# Altium PCB 飞控板.PcbDoc
Units mm, origin at the board's own origin, x right, y up, seen from the top; angles counter-clockwise.
Board outline 69.65 x 72.69 mm, 4 copper layers (Top Layer, VCC, GND, Bottom Layer); 96 components, 107 nets, 389 pads, 187 vias.
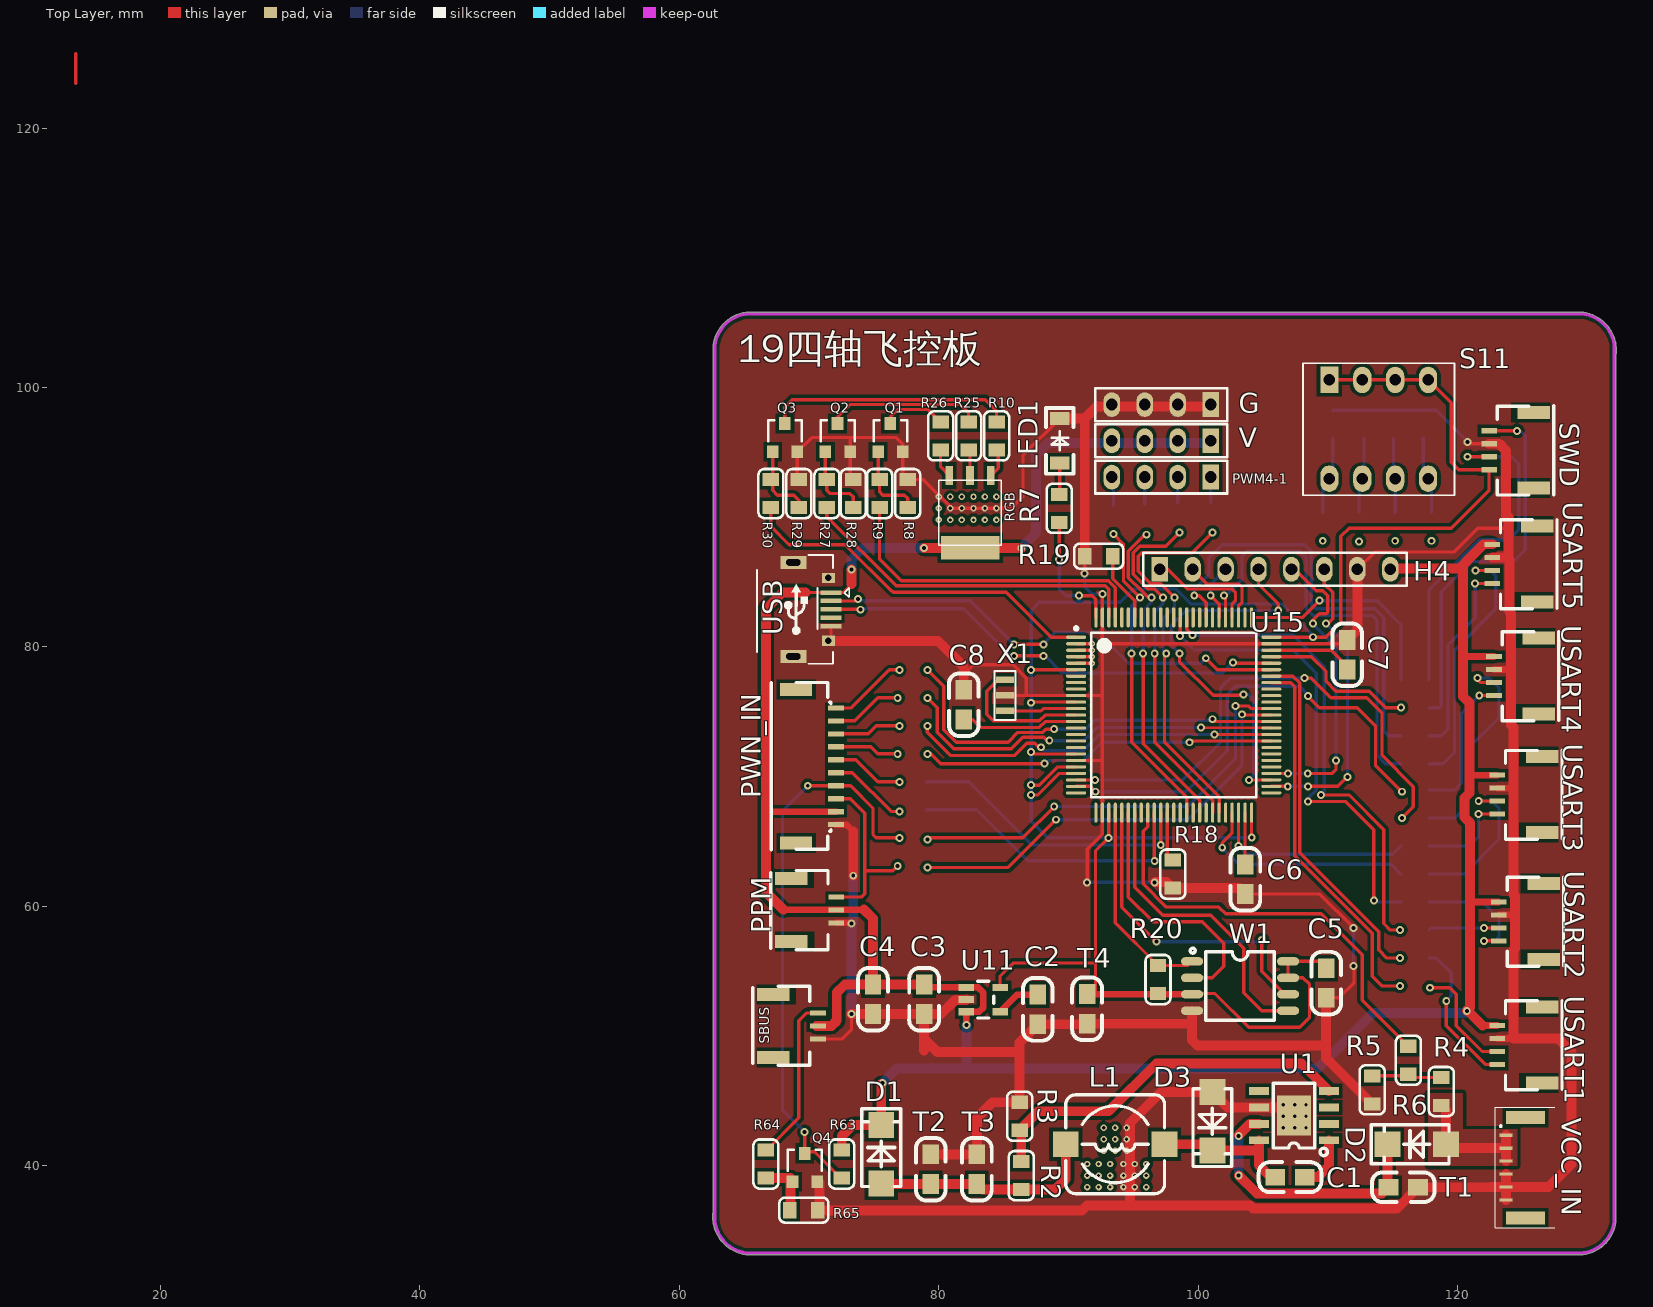
[diagram p0: Top Layer view]
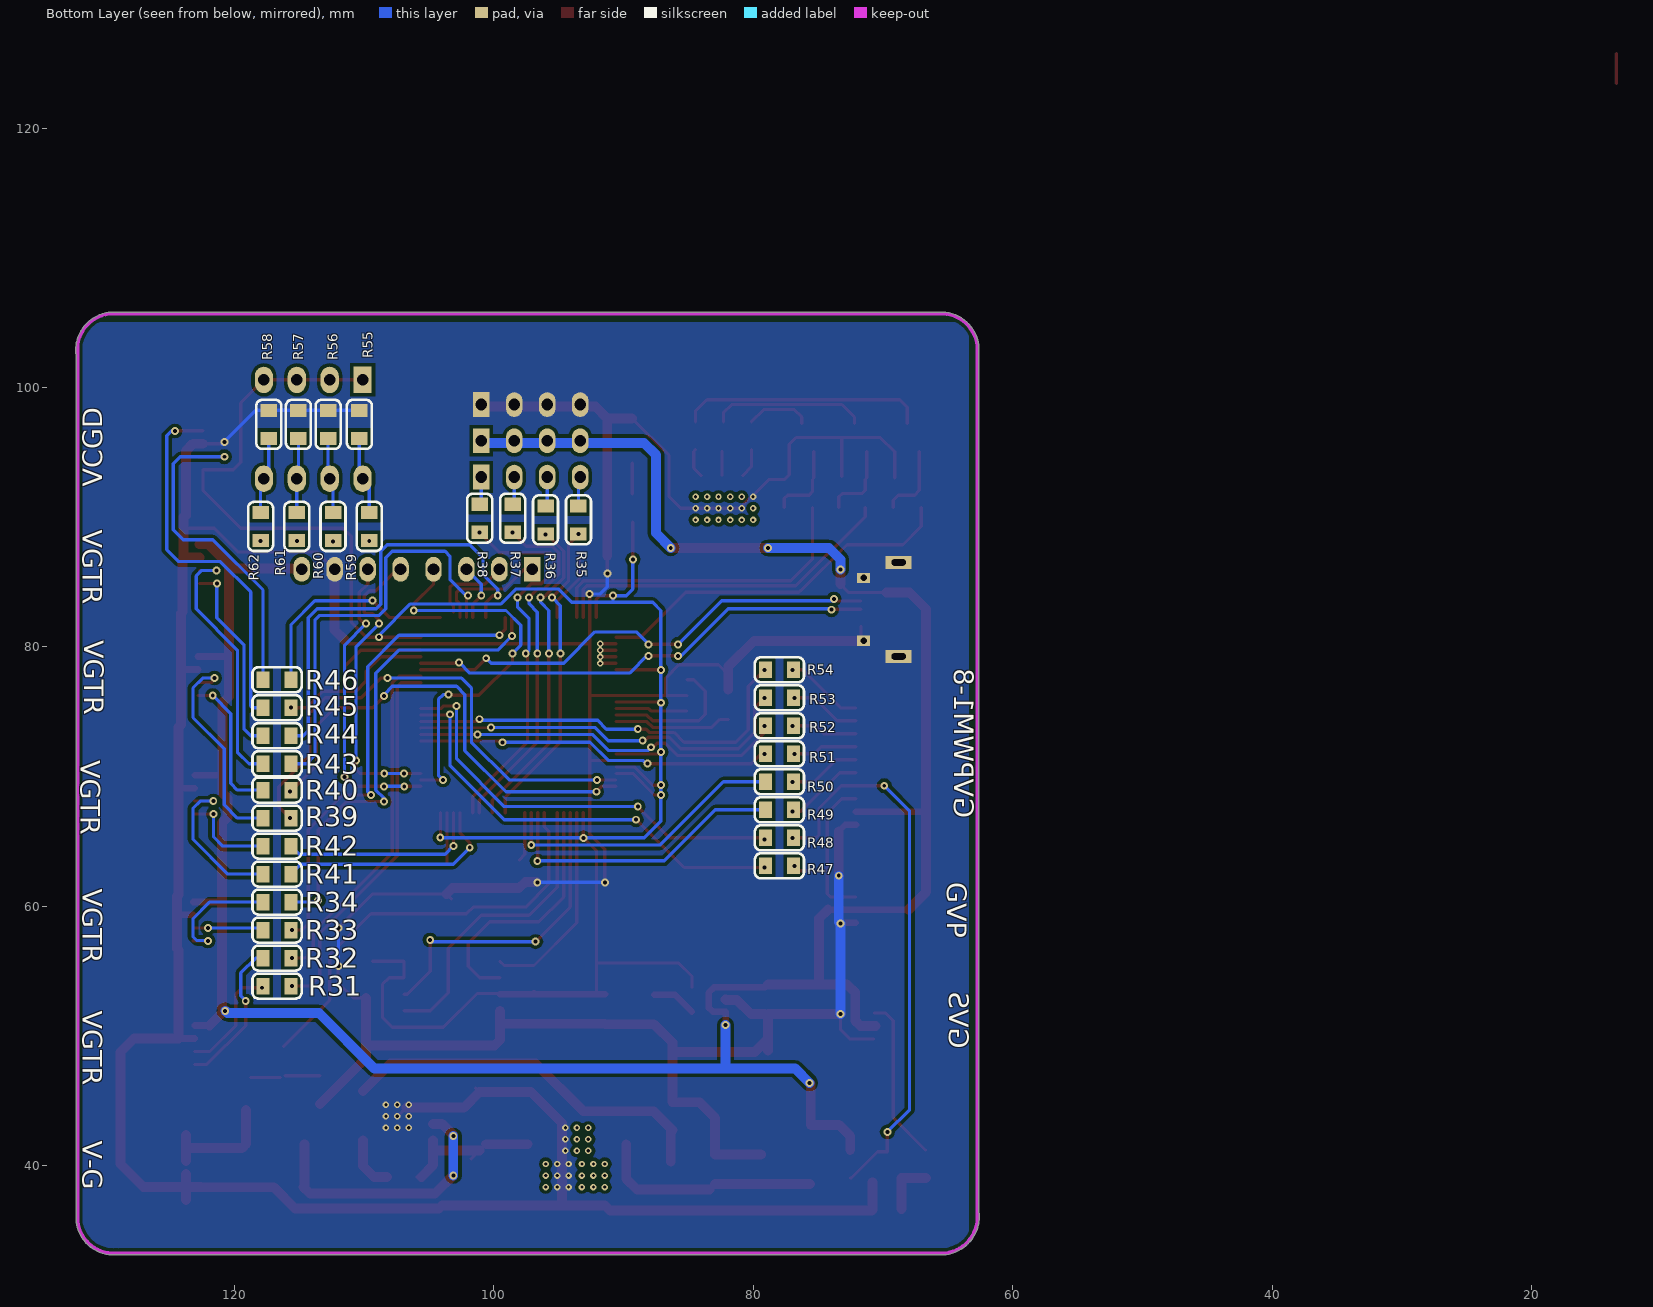
[diagram p1: Bottom Layer view, seen from below]
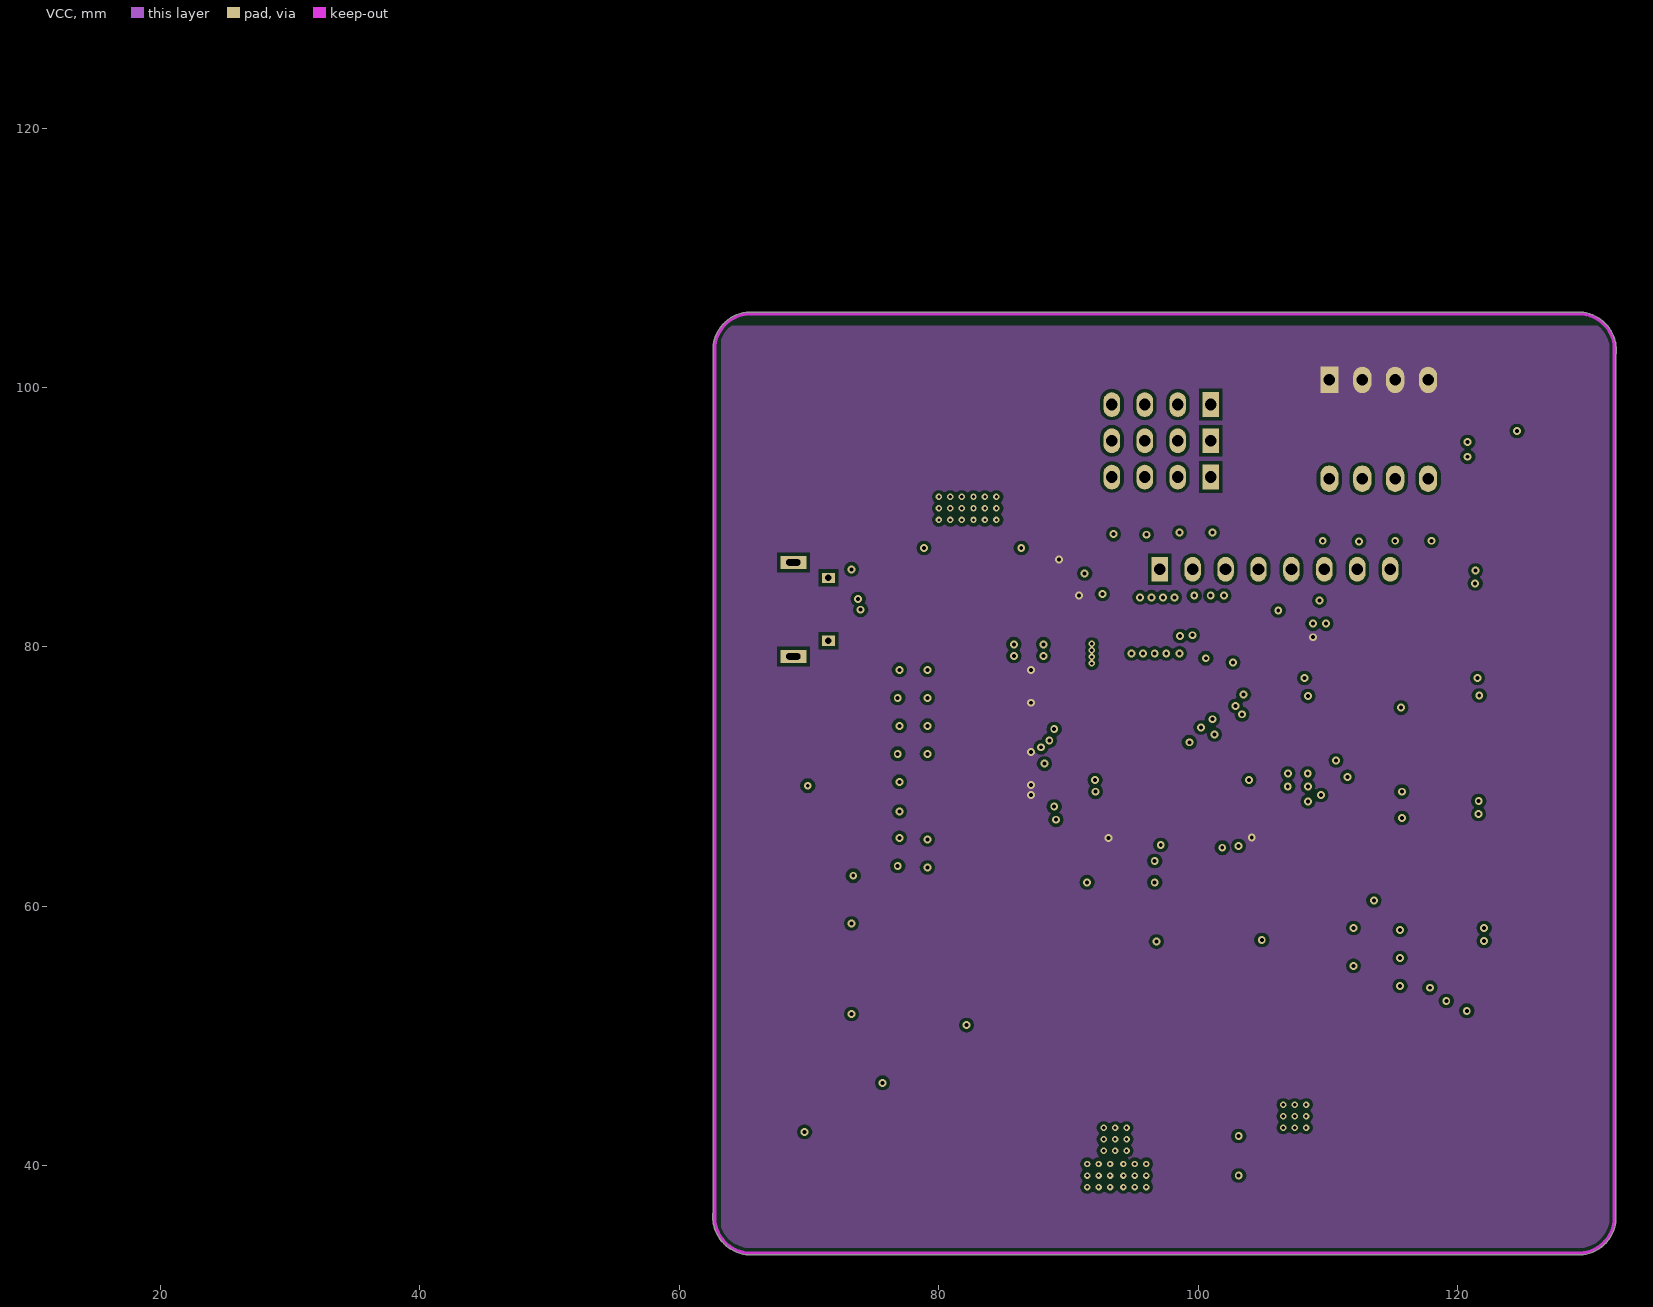
[diagram p2: VCC]
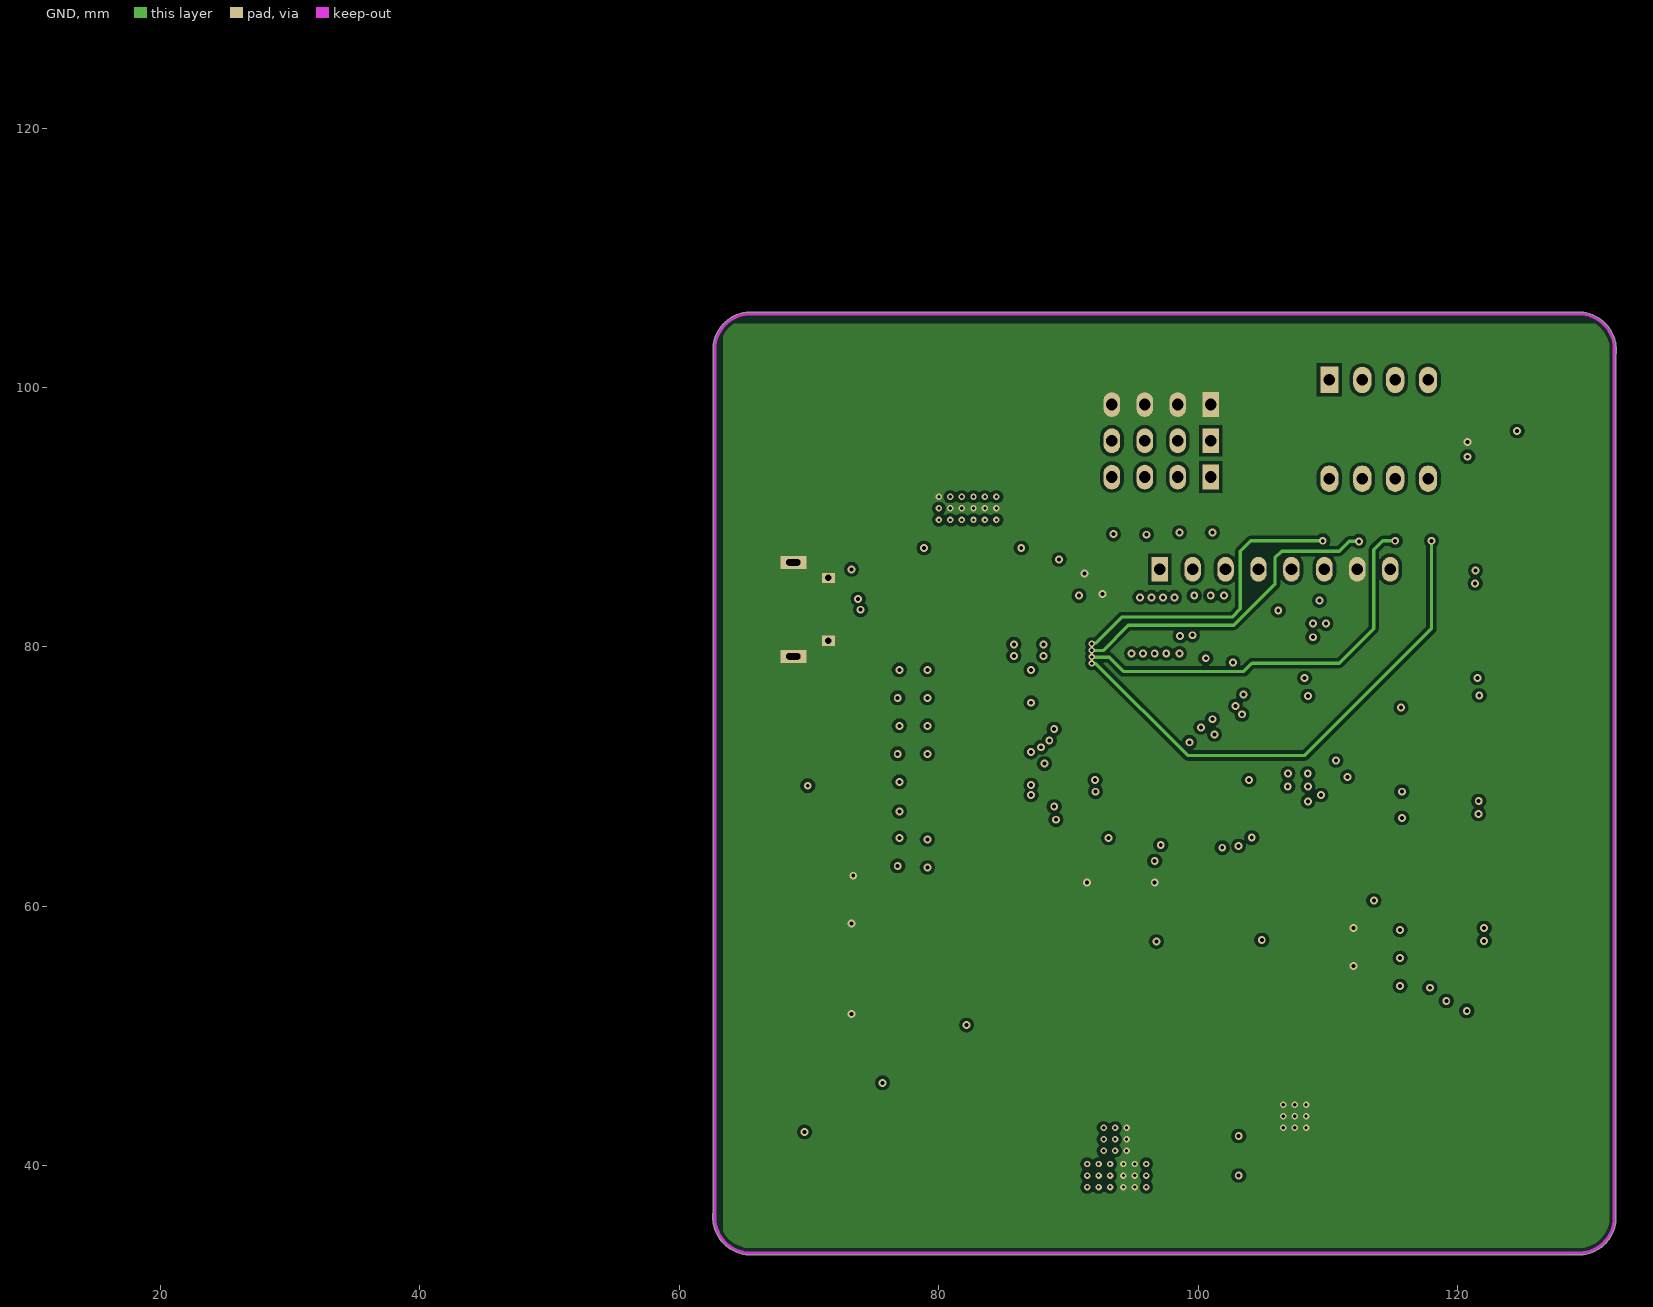
[diagram p3: GND]
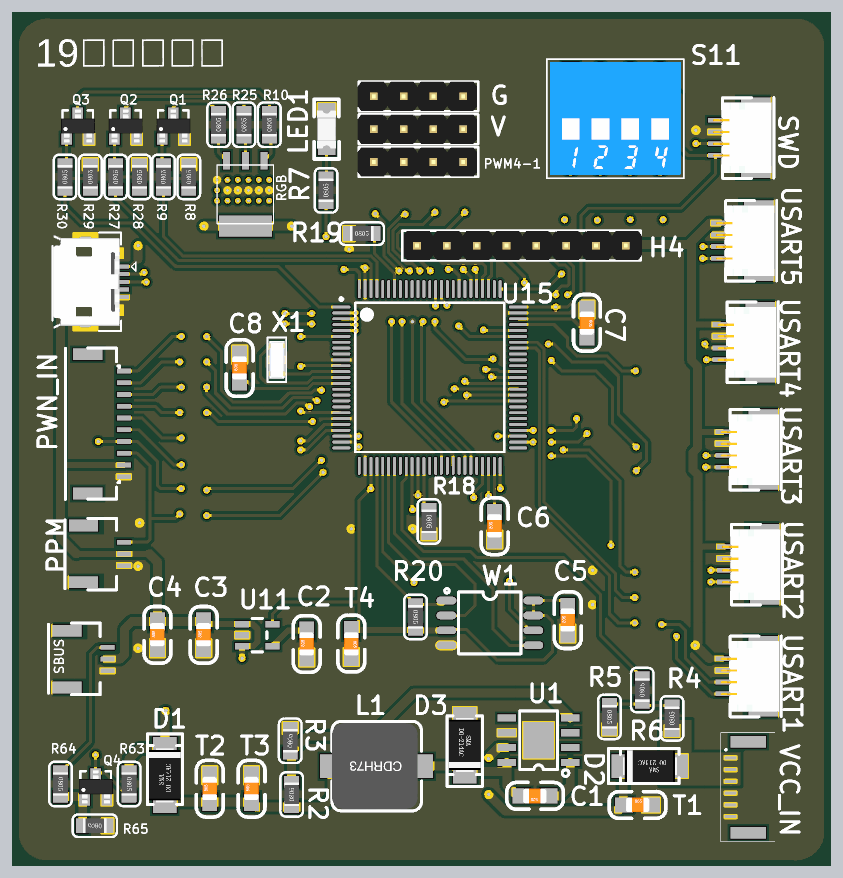
[diagram p4: 3D render of the assembled board from above, using the file's embedded part models]
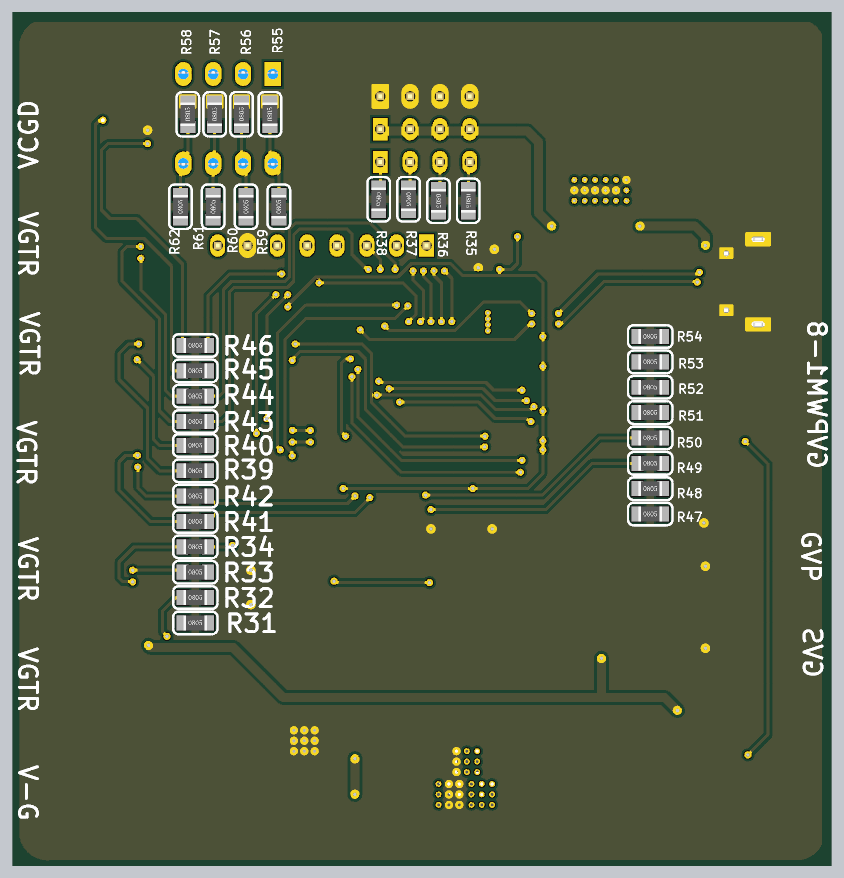
[diagram p5: 3D render of the assembled board from below, using the file's embedded part models]

## Layer stack, top to bottom
Top Layer: signal copper 0.0356
Dielectric: core 0.32, FR-4, Dk 4.8
VCC: signal copper 0.0356
Dielectric: prepreg 0.32, FR-4, Dk 4.8
GND: signal copper 0.0356
Dielectric: core 0.32, FR-4, Dk 4.8
Bottom Layer: signal copper 0.0356

## Board outline
62.646,35.472 ccw(c65.532,36.068) 65.134,33.148 ccw(c65.151,33.274) 65.151,33.147 128.896,33.147 ccw(c129.286,36.068) 132.206,35.67 ccw(c132.08,35.687) 132.207,35.687 132.207,102.48 ccw(c129.286,102.87) 132.233,102.87 ccw(c129.286,102.87) 132.207,103.26 132.207,103.378 ccw(c132.08,103.378) 132.172,103.466 ccw(c129.286,102.87) 129.684,105.79 ccw(c129.667,105.664) 129.667,105.791 65.922,105.791 ccw(c65.532,102.87) 62.612,103.268 ccw(c62.738,103.251) 62.611,103.251 62.611,36.458 ccw(c65.532,36.068) 62.611,35.678 62.611,35.56 ccw(c62.738,35.56)

## Design rules (kind name [scope] priority, off if disabled: settings)
Clearance Clearance_5 [All] p1: gap=0.254
Clearance Clearance_4 [All] p2: gap=0.254
Clearance Clearance_3 [All] p3: gap=0.025
Clearance Clearance_2 [All] p4: gap=0.025
Clearance Clearance_1 [All] p5: gap=0.025
Clearance [All] p6: gap=0.025
PlaneConnect [All] p1: planeconnectstyle=Relief reliefexpansion=0.508 reliefentries=4 reliefconductorwidth=0.508 reliefairgap=0.254
PolygonConnect [All] p1: connectstyle=Direct reliefconductorwidth=0.508 reliefentries=4 polygonreliefangle="90 Angle"
RoutingVias [All] p1: holewidth=0.711 width=1.27 viastyle="Through Hole" minholewidth=0.711 minwidth=1.27 maxholewidth=0.711 maxwidth=1.27
SilkscreenOverComponentPads [All] p1: minsilkscreentomaskgap=0.254
SolderMaskExpansion [All] p1: expansion=0.102
Width [All] p1: maxlimit=0.254 minlimit=0.254 preferedwidth=0.254
26 further rules are at their usual default settings.

## Components (designator, comment, footprint, x,y, rotation, side; value= is the part's Value field where it differs from the comment)
C1 "10nF50V" 0805C 108.204,39.116 r180 top
C2 "0.1uf50v" 0805C 87.63,50.927 r90 top
C3 "0.1uf50v" 0805C 78.857,51.707 r90 top
C4 "4.7uf16v" 0805C 74.92,51.707 r90 top
C5 "1uf10v" 0805C 109.855,52.959 r90 top
C6 "0.1uf50v" 0805C 103.632,60.96 r90 top
C7 "0.1uf50v" 0805C 111.506,80.518 r270 top
C8 "0.1uf50v" 0805C 81.915,74.422 r90 top
D1 "1N5819" DO214AC_SMA 75.565,40.894 r90 top
D2 "1N5819" DO214AC_SMA 116.84,41.656 r180 top
D3 "1N5819" DO214AC_SMA 101.092,43.434 r270 top
G "Header 4" HDR1X4 97.155,98.679 r180 top (schematic designator H3)
H4 "Header 8" HDR1X8 105.918,85.979 r0 top
L1 "CD54-22UH2A" CDRH73 93.599,41.656 r180 top
LED1 "" LED-1206 89.281,96.139 r180 top
PPM "PPM" SH1.0-3P#1 70.358,60.198 r90 bottom (schematic designator U9)
PWM4-1 "Header 4" HDR1X4 97.155,93.091 r180 top (schematic designator H1)
PWN_IN "SH1.0-10P" SH1.0-10P 69.977,70.231 r90 top (schematic designator P1)
Q1 "" SI2310 76.073,96.012 r180 top
Q2 "" SI2310 72.009,96.012 r180 top
Q3 "" SI2310 67.945,96.012 r180 top
Q4 "" SI2310 69.469,39.751 r180 top
R2 "50K" 0805R 86.36,39.243 r90 top
R3 "15K" 0805R 86.233,43.815 r90 top
R4 "10K" 0805R 118.745,45.72 r90 top
R5 "1K" 0805R 113.411,45.847 r270 top
R6 "1K" 0805R 116.205,48.133 r90 top
R7 "1K" 0805R 89.281,90.678 r90 top
R8 "10K" 0805R 77.597,91.821 r90 top
R9 "1K" 0805R 75.438,91.821 r90 top
R10 "50R" 0805R 84.455,96.266 r90 top
R18 "10K" 0805R 98.044,62.484 r270 top
R19 "10K" 0805R 92.329,86.995 r0 top
R20 "4.3K" 0805R 96.901,54.356 r270 top
R25 "50R" 0805R 82.296,96.266 r90 top
R26 "50R" 0805R 80.137,96.266 r90 top
R27 "1K" 0805R 71.374,91.821 r90 top
R28 "10K" 0805R 73.406,91.821 r90 top
R29 "10K" 0805R 69.215,91.821 r90 top
R30 "1K" 0805R 67.056,91.821 r90 top
R31 "1K" 0805R 116.713,53.848 r180 bottom
R32 "1K" 0805R 116.713,56.007 r180 bottom
R33 "1K" 0805R 116.713,58.166 r180 bottom
R34 "1K" 0805R 116.713,60.325 r180 bottom
R35 "1K" 0805R 93.472,89.789 r270 bottom
R36 "1K" 0805R 96.012,89.789 r270 bottom
R37 "1K" 0805R 98.552,89.916 r270 bottom
R38 "1K" 0805R 101.092,89.916 r270 bottom
R39 "1K" 0805R 116.713,66.802 r180 bottom
R40 "1K" 0805R 116.713,68.961 r180 bottom
R41 "1K" 0805R 116.713,62.484 r180 bottom
R42 "1K" 0805R 116.713,64.643 r180 bottom
R43 "1K" 0805R 116.713,70.993 r180 bottom
R44 "1K" 0805R 116.713,73.152 r180 bottom
R45 "1K" 0805R 116.713,75.311 r180 bottom
R46 "1K" 0805R 116.713,77.47 r180 bottom
R47 "1K" 0805R 77.978,63.119 r180 bottom
R48 "1K" 0805R 77.978,65.278 r180 bottom
R49 "1K" 0805R 77.978,67.437 r180 bottom
R50 "1K" 0805R 77.978,69.596 r180 bottom
R51 "1K" 0805R 77.978,71.755 r180 bottom
R52 "1K" 0805R 77.978,73.914 r180 bottom
R53 "1K" 0805R 77.978,76.073 r180 bottom
R54 "1K" 0805R 77.978,78.232 r180 bottom
R55 "10K" 0805R 110.363,97.155 r90 bottom
R56 "10K" 0805R 112.776,97.155 r90 bottom
R57 "10K" 0805R 115.062,97.155 r90 bottom
R58 "10K" 0805R 117.348,97.155 r90 bottom
R59 "10K" 0805R 109.602,89.281 r90 bottom
R60 "10K" 0805R 112.396,89.281 r90 bottom
R61 "10K" 0805R 115.189,89.281 r90 bottom
R62 "10K" 0805R 117.983,89.281 r90 bottom
R63 "10K" 0805R 72.517,40.132 r270 top
R64 "10K" 0805R 66.675,40.132 r270 top
R65 "10K" 0805R 69.596,36.576 r180 top
RGB "" RGB_LED 80.01,92.837 r270 top
S11 "SW-DIP4" 拨码开关4P 113.919,96.774 r0 top
SBUS "SBUS" SH1.0-3P#2 68.961,50.292 r270 bottom (schematic designator U8)
SWD "SWD" SH1.0-4P 125.222,95.25 r270 top (schematic designator U10)
T1 "100uf25V" 0805C 114.681,38.354 r0 top
T2 "47UF16V" 0805C 79.375,38.608 r90 top
T3 "47UF16V" 0805C 82.931,38.608 r90 top
T4 "10uf25V" 0805C 91.44,53.213 r270 top
U1 "TPS5430" TPS5430 107.569,44.704 r90 top
U11 "MIC5219" MIC5219 83.312,52.451 r270 top
U15 "" STM32F407VGT6= 97.917,74.295 r0 top
USART1 "USART1" SH1.0-4P 125.857,49.403 r270 top (schematic designator U3)
USART2 "USART2" SH1.0-4P 125.984,58.928 r270 top (schematic designator U4)
USART3 "USART3" SH1.0-4P 125.857,68.707 r270 top (schematic designator U5)
USART4 "USART4" SH1.0-4P 125.603,77.851 r270 top (schematic designator U6)
USART5 "USART5" SH1.0-4P 125.476,86.487 r270 top (schematic designator U7)
USB "ANO-USB" ANO-USB 69.088,82.804 r270 bottom (schematic designator U2)
V "Header 4" HDR1X4 97.155,95.885 r180 top (schematic designator H2)
VCC_IN "sh1.0-6p" sh1.0-6p 125.349,40.386 r90 top (schematic designator sh1.0-6p)
W1 "W25Q32" W25Q32 103.505,53.721 r270 top
X1 "陶瓷晶振" 陶瓷晶振 85.344,76.073 r270 top

## Footprints (in the part's own frame and the unit in brackets; to place one, negate y for a bottom-side part, rotate by r counter-clockwise, add the part's x,y. Pads: shape width x height; smd on the part's side, far side on the other; paste and mask are expansions set on the pad)
0805C [mil]
  rect 60x50 smd: 1(-0.71,-0.4) 2(89.29,-0.4)
  silkscreen extent -51,-45 139,45, body extent 6,-25 84,25, height 31
0805R [mil]
  rect 40x50 smd: 1(-42.5,0) 2(42.5,0)
  silkscreen extent -75,-38 75,38, body extent -39,-25 39,25, height 22
ANO-USB [mm]
  rect 0.35x1.6 smd far side: 1(-1.385,-2.599) 2(-0.735,-2.599) 3(-0.085,-2.599) 4(0.565,-2.599) 5(1.215,-2.599)
  rect 1x2 hole 0.5 slot 1.1 at 90 deg: 5(-3.71,0.301) 5(3.54,0.301)
  rect 0.8x1 hole 0.5: 5(-2.51,-2.409) 5(2.34,-2.409)
  body extent -4.09,-2.59 3.92,3.01, height 2.8
CDRH73 [mm]
  rect 2x2 smd: 1(-3.81,0) 2(3.81,0)
  silkscreen extent -3.81,-3.81 3.81,3.81, body extent -3.49,-3.65 3.81,3.65, height 3.65
DO214AC_SMA [mm]
  rect 2x2 smd: 1(-2.25,0) 2(2.25,0)
  silkscreen extent -2.5,-1.5 3.5,1.5, body extent -2.33,-1.35 2.27,1.35, height 2.4
HDR1X4 [mm] "C"
  rect 1.27x1.905 hole 0.9: 1(-3.81,0)
  oval 1.27x1.905 hole 0.9: 2(-1.27,0) 3(1.27,0) 4(3.81,0)
  silkscreen extent -5.08,-1.27 5.08,1.27, body extent -4.98,-1.25 5.18,1.25, height 8.2
HDR1X8 [mm]
  rect 1.27x1.905 hole 0.9: 1(-8.89,0)
  oval 1.27x1.905 hole 0.9: 2(-6.35,0) 3(-3.81,0) 4(-1.27,0) 5(1.27,0) 6(3.81,0) 7(6.35,0) 8(8.89,0)
  silkscreen extent -10.16,-1.27 10.16,1.27, body extent -10.06,-1.25 10.26,1.25, height 8.2
LED-1206 [mm]
  rect 1.5x1 smd: 1(-0.051,1.968) 2(-0.051,-1.46)
  silkscreen extent -1.12,-2.29 1.02,2.79, body extent -0.85,-1.32 0.75,1.88, height 1.1
MIC5219 [mil]
  rect 21.7x47.2 smd: 1(-51,-46.4) 2(-14,-46.4) 3(23,-46.4) 4(23,55.6) 5(-51,55.6)
  silkscreen extent -70,-12 42,37
RGB_LED [mm]
  rect 1.8x4.5 smd: 1(5.207,2.413)
  rect 1.5x0.6 smd: 2(-0.373,0.8) 4(-0.373,2.4) 6(-0.373,4)
  silkscreen extent 0,0 5,4.8, body extent 0,0 4.95,4.83, height 3
SH1.0-3P#1 [mm]
  rect 1x2.5 smd far side: 0(-2.897,-1.728) 0(1.945,-1.728)
  rect 0.4x1.2 smd far side: 1(0.525,1.729) 2(-0.475,1.729) 3(-1.475,1.729)
SH1.0-3P#2 [mm]
  rect 1x2.5 smd far side: 0(-2.897,1.728) 0(1.945,1.728)
  rect 0.4x1.2 smd far side: 1(0.525,-1.729) 2(-0.475,-1.729) 3(-1.475,-1.729)
SH1.0-4P [mm]
  rect 0.4x1.2 smd: 1(-1.406,-2.799) 2(-0.406,-2.799) 3(0.594,-2.799) 4(1.594,-2.799)
  rect 1x2.5 smd: 5(-2.827,0.658) 5(3.015,0.658)
  silkscreen extent -3.33,-2.16 3.55,2.18, body extent -2.89,-2.97 3.11,1.99, height 3.14
sh1.0-6p [mm]
  rect 0.25x1 smd: 1(1.968,1.621) 2(0.968,1.621) 3(-0.032,1.621) 4(-1.032,1.621) 5(-2.032,1.621) 6(-3.032,1.621)
  rect 1x3 smd: PAD(-4.407,0.121) PAD(3.343,0.121)
  silkscreen extent -5.18,-2.13 4.12,2.45
SH1.0-10P [mm]
  rect 1x2.5 smd: 0(-5.358,0.982) 0(6.484,0.982)
  rect 0.4x1.2 smd: 1(-3.937,-2.099) 2(-2.937,-2.099) 3(-1.937,-2.099) 4(-0.937,-2.099) 5(0.063,-2.099) 6(1.063,-2.099) 7(2.063,-2.099) 8(3.063,-2.099) 9(4.063,-2.099) 10(5.063,-2.099)
  silkscreen extent -5.87,-1.72 7.02,2.88
SI2310 [mm]
  rect 0.9x0.95 smd: 1(0.75,0.976) 2(-1.155,0.976)
  rect 0.9x1 smd: 3(-0.19,-1.208)
  silkscreen extent -1.5,-1.47 1.1,0.15, body extent -1.67,-1.54 1.23,1.26, height 1.3
STM32F407VGT6= [mm]
  oval 1.55x0.25 smd: 1(-7.33,6.449) 2(-7.33,5.949) 3(-7.33,5.449) 4(-7.33,4.949) 5(-7.33,4.449) 6(-7.33,3.949) 7(-7.33,3.449) 8(-7.33,2.949) 9(-7.33,2.449) 10(-7.33,1.949) 11(-7.33,1.449) 12(-7.33,0.949) 13(-7.33,0.449) 14(-7.33,-0.051) 15(-7.33,-0.551) 16(-7.33,-1.051) 17(-7.33,-1.551) 18(-7.33,-2.051) 19(-7.33,-2.551) 20(-7.33,-3.051) 21(-7.33,-3.551) 22(-7.33,-4.051) 23(-7.33,-4.551) 24(-7.33,-5.051) 25(-7.33,-5.551) 51(7.72,-5.551) 52(7.72,-5.051) 53(7.72,-4.551) 54(7.72,-4.051) 55(7.72,-3.551) 56(7.72,-3.051) 57(7.72,-2.551) 58(7.72,-2.051) 59(7.72,-1.551) 60(7.72,-1.051) 61(7.72,-0.551) 62(7.72,-0.051) 63(7.72,0.449) 64(7.72,0.949) 65(7.72,1.449) 66(7.72,1.949) 67(7.72,2.449) 68(7.72,2.949) 69(7.72,3.449) 70(7.72,3.949) 71(7.72,4.449) 72(7.72,4.949) 73(7.72,5.449) 74(7.72,5.949) 75(7.72,6.449)
  oval 0.25x1.55 smd: 26(-5.805,-7.076) 27(-5.305,-7.076) 28(-4.805,-7.076) 29(-4.305,-7.076) 30(-3.805,-7.076) 31(-3.305,-7.076) 32(-2.805,-7.076) 33(-2.305,-7.076) 34(-1.805,-7.076) 35(-1.305,-7.076) 36(-0.805,-7.076) 37(-0.305,-7.076) 38(0.195,-7.076) 39(0.695,-7.076) 40(1.195,-7.076) 41(1.695,-7.076) 42(2.195,-7.076) 43(2.695,-7.076) 44(3.195,-7.076) 45(3.695,-7.076) 46(4.195,-7.076) 47(4.695,-7.076) 48(5.195,-7.076) 49(5.695,-7.076) 50(6.195,-7.076) 76(6.195,7.974) 77(5.695,7.974) 78(5.195,7.974) 79(4.695,7.974) 80(4.195,7.974) 81(3.695,7.974) 82(3.195,7.974) 83(2.695,7.974) 84(2.195,7.974) 85(1.695,7.974) 86(1.195,7.974) 87(0.695,7.974) 88(0.195,7.974) 89(-0.305,7.974) 90(-0.805,7.974) 91(-1.305,7.974) 92(-1.805,7.974) 93(-2.305,7.974) 94(-2.805,7.974) 95(-3.305,7.974) 96(-3.805,7.974) 97(-4.305,7.974) 98(-4.805,7.974) 99(-5.305,7.974) 100(-5.805,7.974)
  silkscreen extent -7.45,-5.9 6.55,7.25
TPS5430 [mm]
  rect 0.6x1.55 smd: 1(-2.747,-2.508) 2(-1.477,-2.508) 3(-0.207,-2.508) 4(1.063,-2.508) 5(1.063,2.892) 6(-0.207,2.892) 7(-1.477,2.892) 8(-2.747,2.892)
  rect 3.1x2.6 smd: 9(-0.842,0.192)
  silkscreen extent -3.93,-2.39 1.66,1.79
W25Q32 [mm]
  oval 0.65x1.698 smd: 1(-2.032,-3.976) 2(-0.762,-3.976) 3(0.508,-3.976) 4(1.778,-3.976) 5(1.778,3.424) 6(0.508,3.424) 7(-0.762,3.424) 8(-2.032,3.424)
  silkscreen extent -3.05,-4.12 2.5,2.36
拨码开关4P [mil]
  rect 55x80 hole 35.43: 1(-150,150)
  oval 55x80 hole 35.43: 2(-50,150) 3(50,150) 4(150,150) 5(150,-150) 6(50,-150) 7(-50,-150) 8(-150,-150)
  silkscreen extent -230,-200 230,200, body extent -220,-188 220,190, height 248
陶瓷晶振 [mm]
  rect 0.5x1.4 smd: 1(-1.384,-0.24) 2(-0.184,-0.24) 3(1.016,-0.24)
  silkscreen extent -2.08,-1.04 1.72,0.56, body extent -1.78,-0.89 1.42,0.41, height 0.7

## Part data
C2 C3 C4 C5 C6 C7 C8: library part CAP
D1 D2 D3: library part 1N5817-5819SMD
G PWM4-1 V: "Header, 4-Pin"
L1: library part INDUCTOR
PPM SBUS SWD USART1 USART2 USART3 USART4 USART5: library part SH1.
PWN_IN: library part SH1.0
Q1 Q2 Q3 Q4: library part SI
U1: library part TPS
U11: library part MIC
U15: library part STM32F407V
USB: library part ANO
VCC_IN: library part sh1.
W1: library part W2

## Free pads (board coordinates)
  round 0.127 hole 0.127: 0(88.519,72.771) 0(92.054,69.744) 0(108.204,77.597)
  round 0.33 hole 0.203: 0(102.87,75.438) 0(103.378,74.803)

## Via types
v1: diameter 0.61, hole 0.305, Top Layer to Bottom Layer, 128 vias
v2: diameter 0.5, hole 0.25, Top Layer to Bottom Layer, 58 vias
v3: diameter 0.61, hole 0.305, Top Layer to Bottom Layer, tented top, 1 vias

## Nets (pads, with @x,y where several pads share a name; then routed paths per layer and width w, separated by ;. In a path a pad name is that pad's centre, name@x,y a point inside that pad or via, vN(x,y) a via of type N, cw(c..) or ccw(c..) an arc to the next point about the centre after c; other vN are vias at no path point)
BOOT1: R18.1 U15.37 | length 3.8
  Top Layer w0.254: U15.37 97.612,63.995 R18.1
GND: C2.1 C3.1 C4.1 C5.1 C6.1 C7.1 C8.2 D3.1 G.1 G.2 G.3 G.4 H4.7 LED1.2 PPM.3 PWN_IN.1 Q1.2 Q2.2 Q3.2 Q4.2 R3.2 R5.2 R8.2 R18.2 R19.1 R28.2 R29.2 R55.2 R56.2 R57.2 R58.2 R65.1 SBUS.1 SWD.2 T1.2 T2.2 T3.2 T4.2 U1.6 U1.9 U11.2 U15.10 U15.20 U15.27 U15.74 U15.99 USART1.2 USART2.2 USART3.2 USART4.2 USART5.2 USB.5 VCC_IN.4 VCC_IN.5 VCC_IN.6 W1.4 X1.2 | length 439
  Top Layer w0.254: R29.2@69.1,93.015 Q3.2 70.203,96.139 76.708,96.139 77.228,95.619 Q1.2 77.228,93.269 R8.2 78.803,92.901 81.026,90.678 85.598,90.678 86.487,91.567 86.487,94.755 LED1.2 ; SBUS.1 72.517,49.767 73.279,50.529 v1(73.279,51.689) ; USB.5@71.497,80.464 71.687,80.654 USB.5@71.687,81.589 ; PPM.3 PPM.3@72.136,58.674 ; R28.2@73.164,93.142 Q2.2 73.164,96.024 ; v1@73.23,58.723 v1(73.279,58.674) ; C3.1 C3.1@79.121,51.689 ; C8.2@81.816,76.581 C8.2 81.925,77.861 82.677,78.613 85.725,78.613 86.741,77.597 86.741,76.244 ; X1.2 85.117,76.244 X1.2@85.356,76.244 ; X1.2@85.33,76.27 X1.2@85.356,76.244 ; U15.20 92.609,71.244 ; v1(91.25,85.661) R19.1 ; v1(91.44,61.849) 91.44,64.389 92.612,65.561 U15.27 92.612,76.244 ; v1(92.612,84.074) U15.99 92.612,76.244 ; 92.632,80.244 U15.74 111.204,80.244 C7.1 ; D3.1 D3.1@101.382,45.974 ; C6.1@103.279,60.579 C6.1 109.365,60.942 v1(111.978,58.329) ; U1.9@106.742,44.497 U1.9 ; C5.1 110.853,52.941 112.014,54.102 v1@112.014,55.372 ; H4.7 113.602,87.312 119.697,87.312 121.539,89.154 123.912,89.154 ; T1.2 T1.2@117.016,38.411 ; v1@120.92,95.656 SWD.2 ; X1.2@85.356,76.244 86.741,76.244 ; 86.741,76.244 U15.10 92.612,76.244
  Top Layer w0.508: PWN_IN.1 72.898,66.294 73.406,65.786 ; PPM.3 v1@73.23,58.723 ; USART4.2 124.104,78.257 ; USART1.2 124.269,49.809 ; USART3.2 124.269,69.113 ; USART2.2 124.396,59.334
  Top Layer w0.762: Q4.2@70.802,38.724 70.802,36.576 70.835,36.543 91.034,36.543 91.428,36.937 94.742,36.937 ; USB.5@71.497,80.464 79.937,80.464 81.925,78.476 C8.2 ; v1(73.279,51.689) C4.1 C3.1 78.867,48.895 ; v1(73.406,62.357) 73.406,65.786 ; 78.867,49.784 79.883,48.768 86.106,48.768 ; C3.1@79.121,51.689 80.183,51.689 81.271,52.777 82.104,52.777 U11.2 ; T2.2 T3.2 82.941,43.698 84.138,44.895 R3.2 86.233,49.502 C2.1 T4.2@91.394,50.909 ; LED1.2 91.249,97.599 ; R19.1 91.25,97.6 ; T4.2 99.511,50.945 ; G.4@93.159,98.521 G.4@93.218,98.521 ; G.4@93.345,98.648 G.4@93.218,98.521 ; v1@96.678,61.88 97.569,61.88 R18.2 103.18,61.404 C6.1 ; W1.4 99.529,49.696 99.949,49.276 109.728,49.276 ; G.1@100.779,98.521 G.4@93.218,98.521 ; U1.9@106.742,44.497 U1.6 102.279,44.497 D3.1 97.119,45.684 94.742,43.307 94.742,36.937 ; C5.1 109.865,48.313 R5.2 ; C7.1 112.268,81.308 H4.7 ; T1.2@116.949,38.335 115.317,36.703 104.227,36.703 103.993,36.937 94.742,36.937 ; T1.2 122.555,38.344 ; SWD.2 123.209,95.656 123.741,95.123 123.741,90.142 ; 122.565,38.354 VCC_IN.5 ; USART5.2 123.912,86.893 123.912,89.154 123.912,90.027 ; VCC_IN.6 VCC_IN.5 ; VCC_IN.4 VCC_IN.5 ; 123.995,86.707 123.995,82.709 124.122,82.582 124.122,73.989 124.293,73.818 124.293,60.924 124.42,60.797 124.42,56.744 124.293,56.617 124.293,49.809 127.737,49.809 128.778,48.768 128.778,40.132 127,38.354 VCC_IN.5 ; 91.25,97.6 92.171,98.521 G.4@93.218,98.521
  Bottom Layer w0.254: v1(73.279,51.689) v1@73.439,51.849 ; v1@73.279,62.23 v1(73.406,62.357) ; v1(91.25,85.661) 91.25,84.645 91.821,84.074 v1(92.612,84.074) ; v1(91.44,61.849) v1(96.647,61.849) ; R55.2 R56.2 R57.2 R58.2 118.341,98.234 v1(120.777,95.799) v1@120.945,95.631 ; v1(111.978,55.408) v1(111.978,58.329)
  Bottom Layer w0.762: v1(73.279,51.689) v1(73.279,58.674) ; v1@73.406,58.801 v1(73.406,62.357)
  other v2: 94.234,38.354 95.116,38.354 94.234,39.243 95.116,39.243 94.234,40.132 95.116,40.132 94.475,41.148 94.475,42.037 94.475,42.926 106.553,42.926 107.435,42.926 108.318,42.926 106.553,43.815 107.435,43.815 108.318,43.815 106.553,44.704 107.435,44.704 108.318,44.704 80.892,90.678 81.775,90.678 82.677,90.678 83.559,90.678 84.442,90.678 80.01,91.567
GYR_INT: U15.88
LED_1: R9.1 U15.97 | length 25.4
  Top Layer w0.254: R9.1 75.438,86.741 77.089,85.09 93.091,85.09 93.129,85.052 93.129,85.038 93.612,84.555 U15.97
LED_2: R27.1 U15.98 | length 26.9
  Top Layer w0.254: R27.1 71.374,90.043 76.708,84.709 92.837,84.709 93.112,84.434 U15.98
LED_3: R30.1 U15.1 | length 28.5
  Top Layer w0.254: R30.1 67.056,89.281 68.453,87.884 72.771,87.884 76.341,84.314 76.385,84.314 76.498,84.201 85.217,84.201 88.674,80.744 U15.1
NetC1_1: C1.1 U1.1 | length 4.2
  Top Layer w0.762: C1.1 109.23,39.126 110.077,39.973 U1.1
NetC1_2: C1.2 D3.2 L1.1 U1.8 | length 12.1
  Top Layer w0.254: D3.2@100.62,41.656 D3.2 D3.2@101.763,40.513 ; C1.2@105.4,39.126 105.585,39.126 C1.2
  Top Layer w0.762: L1.1 D3.2@100.62,41.656 ; D3.2 104.641,41.184 ; U1.8 104.677,40.034 C1.2@105.585,39.126
NetC2_2: C2.2 U11.4 | length 3.5
  Top Layer w0.508: U11.4 86.053,53.195 C2.2
NetC6_2: C6.2 U15.49 | length 4
  Top Layer w0.254: C6.2@103.612,63.258 U15.49
NetC7_2: C7.2 U15.73 | length 6.6
  Top Layer w0.254: U15.73 110.248,79.744 111.496,78.496 C7.2
NetC8_1: C8.1 U15.14 | length 9.1
  Top Layer w0.254: C8.1 82.568,74.404 83.185,73.787 87.757,73.787 88.214,74.244 U15.14
NetD1_1: D1.1 L1.2 R2.1 T2.1 T3.1 | length 17.4
  Top Layer w0.254: T3.1 T3.1@83.368,38.164
  Top Layer w0.762: D1.1@75.619,38.59 T2.1 T3.1 ; T3.1@83.368,38.164 R2.1 88.964,38.164 89.789,38.989 L1.2
NetLED1_1: LED1.1 R7.2 | length 2.4
  Top Layer w0.254: R7.2@89.332,91.808 LED1.1
NetQ1_1: Q1.1 R8.1 R9.2 | length 6
  Top Layer w0.254: R9.2@75.323,93.015 Q1.1 ; R9.2 75.438,91.948 75.692,91.694 77.343,91.694 77.597,91.44 R8.1
NetQ1_3: Q1.3 R26.2 | length 5
  Top Layer w0.254: Q1.3 76.263,97.726 76.835,98.298 79.185,98.298 R26.2
NetQ2_1: Q2.1 R27.2 R28.1 | length 5.9
  Top Layer w0.254: R27.2@71.259,93.015 Q2.1 ; R27.2 71.374,92.075 71.628,91.821 73.152,91.821 73.406,91.567 R28.1
NetQ2_3: Q2.3 R25.2 | length 12
  Top Layer w0.254: Q2.3 72.199,97.726 73.152,98.679 81.661,98.679 82.296,98.044 R25.2
NetQ3_1: Q3.1 R29.1 R30.2 | length 5.9
  Top Layer w0.254: Q3.1 67.195,92.063 67.564,91.694 68.834,91.694 69.215,91.313 R29.1
NetQ3_3: Q3.3 R10.2 | length 19
  Top Layer w0.254: Q3.3 68.135,98.488 68.707,99.06 83.566,99.06 84.455,98.171 R10.2
NetQ4_1: Q4.1 R64.2 R65.2 | length 4.3
  Top Layer w0.762: R64.2 68.569,39.052 R65.2@68.569,36.651
NetR2_2: R2.2 R3.1 U1.4 | length 29.1
  Top Layer w0.762: R3.1 87.693,44.196 93.091,44.196 96.774,47.879 107.965,47.879 U1.4 ; R2.2 R3.1@86.36,42.609
NetR4_2: R4.2 R5.1 R6.1 | length 5
  Top Layer w0.254: R5.1 R6.1@116.078,46.926 ; R6.1@116.459,46.8 R4.2
NetR10_1: R10.1 RGB.6 | length 2.3
  Top Layer w0.254: RGB.6 84.582,93.782 84.582,95.06 R10.1
NetR19_2: R19.2 U15.94 | length 5.4
  Top Layer w0.254: R19.2 93.409,85.269 95.112,83.565 U15.94
NetR25_1: R25.1 RGB.4 | length 1.9
  Top Layer w0.254: RGB.4 R25.1@82.41,95.073
NetR26_1: R26.1 RGB.2 | length 2.3
  Top Layer w0.254: R26.1 80.137,93.883 RGB.2
NetR55_1: R55.1 R59.2 S11.8 | length 6
  Bottom Layer w0.254: R59.2 109.602,92.457 S11.8 110.363,93.218 R55.1
NetR56_1: R56.1 R60.2 S11.7 | length 5.7
  Bottom Layer w0.254: R60.2 112.396,92.711 S11.7 ; S11.7@112.776,93.091 R56.1
NetR57_1: R57.1 R61.2 S11.6 | length 5.6
  Bottom Layer w0.254: S11.6@115.062,93.091 R57.1 ; R61.2 S11.6
NetR58_1: R58.1 R62.2 S11.5 | length 5.4
  Bottom Layer w0.254: S11.5@117.348,93.345 R58.1 ; S11.5 117.983,92.71 R62.2
NetU15_12: U15.12 X1.3 | length 5.6
  Top Layer w0.254: X1.3 87.884,75.057 88.071,75.244 U15.12
NetU15_13: U15.13 X1.1 | length 10.8
  Top Layer w0.254: X1.1 84.569,77.457 83.693,76.581 83.693,74.803 84.201,74.295 87.757,74.295 88.206,74.744 U15.13
OTG_FS_DM: U15.70 USB.2 | length 37.1
  Top Layer w0.254: USB.2 73.633,83.539 v1(73.787,83.693) ; v1(85.785,80.197) v1(88.071,80.197) ; v1(100.584,79.121) 101.461,78.244 U15.70
  Bottom Layer w0.254: v1@73.914,83.566 82.416,83.566 v1(85.785,80.197) ; v1@88.138,80.264 89.027,81.153 92.202,81.153 94.615,78.74 100.203,78.74 v1(100.584,79.121)
OTG_FS_DP: U15.71 USB.3 | length 36.2
  Top Layer w0.254: USB.3 73.949,82.889 v1(73.974,82.864) ; v1(85.785,79.308) v1(88.071,79.308) ; v1@102.747,78.744 U15.71
  Bottom Layer w0.254: v1@74.041,82.931 81.915,82.931 85.538,79.308 v1(85.785,79.308) ; v1@88.138,79.375 89.535,77.978 101.854,77.978 v1(102.676,78.8)
POWER_INPUT: R6.2 U15.34 | length 33.3
  Top Layer w0.254: U15.34 96.112,66.14 95.758,65.786 95.758,61.722 97.536,59.944 101.6,59.944 102.108,59.436 109.474,59.436 112.649,56.261 112.649,52.769 R6.2
PPM_IN: PPM.1 PWN_IN.3 R47.2 | length 13.9
  Top Layer w0.254: PWN_IN.3 73.184,68.294 74.295,67.183 74.295,62.738 ; PPM.1 74.058,60.723 74.295,60.96 74.295,62.738 ; v1(76.835,63.119) 76.454,62.738 74.295,62.738
PWMIN_2: PWN_IN.4 Q4.3 R48.2 R63.2 | length 43.3
  Top Layer w0.254: v1(69.659,42.608) 69.659,41.086 70.42,41.086 72.454,39.052 R63.2 ; v1(69.898,69.294) PWN_IN.4 73.2,69.294 74.93,67.564 74.93,65.532 75.184,65.278 v1(76.962,65.278)
  Bottom Layer w0.254: v1(69.659,42.608) 67.945,44.322 67.945,67.341 v1(69.898,69.294)
PWMIN_3: PWN_IN.5 R49.2 | length 6.1
  Top Layer w0.254: PWN_IN.5 73.343,70.294 76.327,67.31 v1(76.962,67.31)
PWMIN_4: PWN_IN.6 R50.2 | length 5.6
  Top Layer w0.254: PWN_IN.6 73.613,71.294 75.311,69.596 v1(76.962,69.596)
PWMIN_5: PWN_IN.7 R51.2 | length 5
  Top Layer w0.254: PWN_IN.7 74.772,72.294 75.311,71.755 v1(76.835,71.755)
PWMIN_6: PWN_IN.8 R52.2 | length 5.1
  Top Layer w0.254: PWN_IN.8 74.564,73.294 75.184,73.914 v1(76.962,73.914)
PWMIN_7: PWN_IN.9 R53.2 | length 5.5
  Top Layer w0.254: PWN_IN.9@72.077,74.295 PWN_IN.9 73.532,74.294 75.311,76.073 v1(76.835,76.073)
PWMIN_8: PWN_IN.10 R54.2 | length 6.1
  Top Layer w0.254: PWN_IN.10 73.262,75.294 76.2,78.232 v1(76.962,78.232)
PWMOUT_1: PWM4-1.1 R38.1 | length 2
  Bottom Layer w0.254: R38.1@100.965,91.122 PWM4-1.1
PWMOUT_2: PWM4-1.2 R37.1 | length 2
  Bottom Layer w0.254: R37.1@98.425,91.122 PWM4-1.2
PWMOUT_3: PWM4-1.3 R36.1 | length 2.1
  Bottom Layer w0.254: R36.1@95.885,90.995 PWM4-1.3
PWMOUT_4: PWM4-1.4 R35.1 | length 2.1
  Bottom Layer w0.254: R35.1 PWM4-1.4@93.472,92.964
SPI1_CLK: U15.30 W1.6 | length 24.2
  Top Layer w0.254: U15.30 94.112,59.939 v1(96.774,57.277) ; v1(104.902,57.404) 104.902,54.988 106.677,53.213 W1.6
  Bottom Layer w0.254: v1(96.774,57.277) v1@104.775,57.277
SPI1_MISO: U15.31 W1.2 | length 20
  Top Layer w0.254: U15.31 94.612,60.709 96.52,58.801 100.33,58.801 101.981,57.15 101.981,55.372 101.092,54.483 W1.2
SPI1_MOSI: U15.32 W1.5 | length 23.5
  Top Layer w0.254: U15.32 95.112,61.479 97.282,59.309 100.965,59.309 103.505,56.769 103.505,53.34 104.902,51.943 W1.5
SPI1_NSS: R20.1 U15.29 W1.1 | length 15.9
  Top Layer w0.254: 93.612,58.725 U15.29 ; 93.637,58.699 R20.1 99.211,55.435 W1.1
SPI2_CLK: H4.6 U15.52 | length 23.3
  Top Layer w0.254: U15.52 v1(106.905,69.244) ; v1(108.458,69.244) 110.773,69.244 v1(111.506,69.977) ; H4.6 109.728,84.836 110.363,84.201 110.363,82.169 v1@109.982,81.788
  Bottom Layer w0.254: v1(106.905,69.244) v1(108.458,69.244) ; v1(109.855,81.788) 111.506,80.137 v1(111.506,69.977)
SPI2_CS1: H4.3 U15.81 | length 5
  Top Layer w0.254: v1(100.965,83.947) 101.612,83.3 U15.81
  Bottom Layer w0.254: v1(100.965,83.947) 100.965,84.836 H4.3 H4.3@102.108,85.471
SPI2_CS2: H4.2 U15.78 | length 6.4
  Top Layer w0.254: H4.2 100.711,84.836 103.137,84.836 103.378,84.595 103.378,83.439 103.112,83.173 U15.78@103.112,82.689
SPI2_CS3: H4.1 U15.79 | length 9.1
  Top Layer w0.254: H4.1@97.028,85.471 H4.1 97.663,85.979 99.187,84.455 102.616,84.455 102.87,84.201 102.87,83.566 102.612,83.308 U15.79
SPI2_MISO: H4.4 U15.53 | length 30.7
  Top Layer w0.254: v1(98.552,79.502) 98.552,78.867 101.155,76.263 103.441,76.263 v1(103.505,76.327) ; v1(103.907,69.744) U15.53 ; H4.4 104.648,84.836 106.172,83.312 v1(106.172,82.804)
  Bottom Layer w0.254: v1(98.552,79.502) 97.917,80.137 97.917,81.661 99.06,82.804 v1(106.172,82.804) ; v1(103.505,76.327) 103.886,76.327 104.267,75.946 104.267,70.104 v1(103.907,69.744)
SPI2_MOSI: H4.5 U15.54 | length 23.7
  Top Layer w0.254: U15.54 v1(106.921,70.244) ; H4.5 107.442,85.979 109.093,84.328 109.601,84.328 109.982,83.947 109.982,82.677 109.855,82.55 109.347,82.55 108.839,82.042 v1(108.839,81.788) ; v1(108.445,70.244) 110.35,70.244 110.617,70.511 v1(110.617,71.247)
  Bottom Layer w0.254: v1(106.921,70.244) v1(108.445,70.244) ; v1(108.839,81.788) 110.617,80.01 v1(110.617,71.247)
SPI2_NSS: U15.51
SUBS_IN: R64.1 SBUS.3 | length 12.8
  Top Layer w0.254: R64.1 66.738,41.211 69.215,43.688 69.215,51.181 69.801,51.767 SBUS.3
SW1: R59.1 U15.2 | length 24.9
  Top Layer w0.254: U15.2 v2(91.801,80.244)
  GND w0.254: v2@91.821,80.296 92.107,80.296 94.107,82.296 102.616,82.296 103.251,82.931 103.251,87.376 104.054,88.179 v1(109.601,88.179)
SW2: R60.1 U15.3 | length 26.5
  Top Layer w0.254: U15.3 v2@91.755,79.744
  GND w0.254: v2@91.784,79.715 92.669,79.715 94.615,81.661 102.743,81.661 105.918,84.836 105.918,86.868 106.426,87.376 110.871,87.376 111.633,88.138 v1(112.395,88.138)
  other v2: 91.801,79.736
SW3: R61.1 U15.4 | length 32.8
  Top Layer w0.254: U15.4 v2@91.747,79.244
  GND w0.254: v2@91.784,79.207 93.132,79.207 94.234,78.105 103.505,78.105 104.14,78.74 110.871,78.74 113.538,81.407 113.538,87.503 114.214,88.179 v1(115.189,88.179)
  other v2: 91.801,79.228
SW4: R62.1 U15.5 | length 41.1
  Top Layer w0.254: U15.5 v2@91.739,78.744
  GND w0.254: v2@91.784,78.699 92.116,78.699 99.187,71.628 108.204,71.628 117.983,81.407 v1(117.983,88.179)
  other v2: 91.801,78.72
SWCLK: R46.2 U15.76 | length 17.1
  Top Layer w0.254: U15.76 108.05,82.269 v1(109.347,83.566)
  Bottom Layer w0.254: v1(109.347,83.566) 113.792,83.566 115.633,81.725 R46.2
SWCLK_I: R46.1 SWD.3 | length 27
  Top Layer w0.254: v1(120.777,94.656) SWD.3 SWD.3@122.812,94.656
  Bottom Layer w0.254: R46.1 117.792,84.391 121.666,88.265 123.952,88.265 124.714,89.027 124.714,94.107 124.165,94.656 v1(120.777,94.656)
SWDIO: R45.2 U15.72 | length 12.1
  Top Layer w0.254: U15.72 108.712,79.244 109.855,78.101 109.855,77.343 110.617,76.581 113.19,76.581 114.46,75.311 v1(115.633,75.311)
SWDIO_I: R45.1 SWD.1 | length 29.1
  Top Layer w0.254: SWD.1 v1@124.578,96.656
  Bottom Layer w0.254: R45.1 118.618,75.311 118.745,75.438 118.745,84.236 121.087,86.579 124.298,86.579 125.222,87.503 125.222,96.266 v1@124.841,96.647
  other v1: 124.587,96.647
TIM1_CH1: R35.2 U15.40 | length 24.3
  Top Layer w0.254: v1(93.472,88.687) 94.234,87.925 94.234,85.09 v1(95.504,83.82) ; v1(94.869,79.502) 94.869,72.644 99.112,68.401 U15.40
  Bottom Layer w0.254: v1(94.869,79.502) 94.869,83.185 v1(95.504,83.82)
TIM1_CH2: R36.2 U15.42 | length 25
  Top Layer w0.254: v1(95.758,79.502) 95.758,72.517 100.112,68.163 U15.42 ; v1(96.012,88.646) 95.885,88.646 94.615,87.376 94.615,85.344 95.682,84.277 95.693,84.277 95.961,84.009 95.961,83.998 96.139,83.82 v1(96.393,83.82)
  Bottom Layer w0.254: v1(95.758,79.502) 95.758,82.804 96.393,83.439 v1(96.393,83.82)
TIM1_CH3: R37.2 U15.44 | length 27.6
  Top Layer w0.254: v3(96.647,79.502) 96.647,72.644 101.112,68.179 U15.44 ; v1(97.282,83.82) 96.647,84.455 96.139,84.455 94.996,85.598 94.996,87.263 95.49,87.757 97.495,87.757 v1(98.552,88.814)
  Bottom Layer w0.254: v3(96.647,79.502) 96.647,82.677 97.282,83.312 v1(97.282,83.82)
TIM1_CH4: R38.2 U15.45 | length 30.1
  Top Layer w0.254: v1(97.536,79.502) 97.409,79.375 97.409,72.644 101.612,68.441 U15.45 ; v1(98.171,83.82) 97.117,84.874 96.33,84.874 95.377,85.827 95.377,86.995 95.631,87.249 99.527,87.249 v1(101.092,88.814)
  Bottom Layer w0.254: v1(97.536,79.502) 97.282,79.756 97.282,82.169 98.171,83.058 v1(98.171,83.82)
TIM3_CH1: pad.0@103.378,74.803 R47.1 U15.63 | length 33.7
  Top Layer w0.254: v1(79.121,62.992) 85.344,62.992 v1(89.027,66.675) ; v1(103.378,74.803) 103.437,74.744 U15.63
  Bottom Layer w0.254: v1(89.027,66.675) 99.187,66.675 103.378,70.866 v1(103.378,74.803)
TIM3_CH2: pad.0@102.87,75.438 R48.1 U15.64 | length 33.1
  Top Layer w0.254: v1@79.248,65.278 86.487,65.278 v1(88.9,67.691) ; v1(102.87,75.438) 103.886,75.438 104.08,75.244 U15.64
  Bottom Layer w0.254: v1(88.9,67.691) 99.187,67.691 102.87,71.374 v1(102.87,75.438)
  other v1: 79.121,65.151
TIM3_CH3: R49.1 U15.35 | length 23
  Top Layer w0.254: U15.35 96.612,63.535 v1(96.647,63.5)
  Bottom Layer w0.254: R49.1 82.931,67.437 86.868,63.5 v1(96.647,63.5)
TIM3_CH4: R50.1 U15.36 | length 22.6
  Top Layer w0.254: v1(97.112,64.727) U15.36
  Bottom Layer w0.254: R50.1 82.296,69.596 87.165,64.727 v1(97.112,64.727)
TIM4_CH1: R51.1 U15.59 | length 27.6
  Top Layer w0.254: v1(79.121,71.755) 79.375,71.755 80.137,70.993 v1(88.138,70.993) ; v1(99.314,72.644) 99.414,72.744 U15.59
  Bottom Layer w0.254: v1(88.138,70.993) 88.265,70.993 88.519,71.247 91.186,71.247 92.583,72.644 v1(99.314,72.644)
TIM4_CH2: R52.1 U15.60 | length 29
  Top Layer w0.254: v1(79.121,73.914) 79.121,73.406 80.899,71.628 85.852,71.628 86.792,72.568 87.406,72.568 87.711,72.263 v1(87.884,72.263) v1@87.808,72.339 ; v1(101.254,73.244) U15.60
  Bottom Layer w0.254: v1(87.884,72.263) 88.138,72.009 91.142,72.009 92.374,73.241 101.251,73.241 v1(101.254,73.244)
TIM4_CH3: pad.0@88.519,72.771 R53.1 U15.61 | length 30.2
  Top Layer w0.254: v1(79.121,76.073) 79.883,75.311 79.883,73.406 81.153,72.136 85.598,72.136 86.487,73.025 88.092,73.025 88.346,72.771 v1(88.519,72.771) ; v1(100.203,73.787) U15.61
  Bottom Layer w0.254: v1(88.519,72.771) 91.186,72.771 92.202,73.787 v1(100.203,73.787)
TIM4_CH4: R54.1 U15.62 | length 31.8
  Top Layer w0.254: v1(79.121,78.232) 80.391,76.962 80.391,73.616 81.363,72.644 85.344,72.644 86.106,73.406 88.011,73.406 88.265,73.66 v1(88.9,73.66) ; v1(101.092,74.422) 101.27,74.244 U15.62
  Bottom Layer w0.254: v1(88.9,73.66) 91.313,73.66 91.986,74.333 101.206,74.333 101.117,74.422 v1(101.092,74.422)
TIM10_CH1: U15.95
USART1_RX: R32.2 U15.69 | length 27.4
  Top Layer w0.254: U15.69 107.295,77.744 107.823,77.216 107.823,64.135 113.919,58.039 113.919,56.642 114.554,56.007 v1(115.57,56.007)
USART1_RX_I: R32.1 USART1.4 | length 11.6
  Top Layer w0.254: v1(119.126,52.705) 119.126,50.8 122.117,47.809 USART1.4
  Bottom Layer w0.254: R32.1 118.364,56.007 119.507,54.864 119.507,53.086 v1(119.126,52.705)
USART1_TX: R31.2 U15.68 | length 29.2
  Top Layer w0.254: U15.68 107.134,77.244 107.442,76.937 107.442,63.881 113.411,57.912 113.411,54.61 114.173,53.848 v1(115.57,53.848)
USART1_TX_I: R31.1 USART1.3 | length 8.7
  Top Layer w0.254: v1(117.856,53.721) 119.38,53.721 119.888,53.213 119.888,50.8 121.879,48.809 USART1.3
USART2_RX: R34.2 U15.87 | length 36.7
  Top Layer w0.254: v1(98.612,80.839) U15.87 ; v1(108.458,68.072) 111.379,68.072 113.538,65.913 v1(113.538,60.452)
  Bottom Layer w0.254: v1(98.612,80.839) 99.695,79.756 107.315,79.756 109.093,77.978 109.093,68.961 108.458,68.326 v1(108.458,68.072) ; v1@113.665,60.325 R34.2
USART2_RX_I: R34.1 USART2.4 | length 9.7
  Top Layer w0.254: v1(122.047,57.334) USART2.4
  Bottom Layer w0.254: R34.1 121.92,60.325 123.19,59.055 123.19,57.658 122.896,57.364 v1@122.047,57.364
USART2_TX: R33.2 U15.86 | length 37.4
  Top Layer w0.254: U15.86 99.112,81.355 v1(99.568,80.899) ; v1(109.474,68.58) 111.633,68.58 114.3,65.913 114.3,58.674 114.808,58.166 v1(115.57,58.166)
  Bottom Layer w0.254: v1(99.568,80.899) 107.315,80.899 109.728,78.486 109.728,68.834 v1(109.474,68.58)
USART2_TX_I: R33.1 USART2.3 | length 5.5
  Top Layer w0.254: v1(122.047,58.334) USART2.3
  Bottom Layer w0.254: R33.1 117.96,58.334 v1(122.047,58.334)
USART3_RX: R42.2 U15.48 | length 15.6
  Top Layer w0.254: v1(103.112,64.655) U15.48
  Bottom Layer w0.254: v1(103.112,64.655) 103.759,64.008 114.998,64.008 R42.2
USART3_RX_I: R42.1 USART3.4 | length 7.3
  Top Layer w0.254: v1(121.609,67.113) USART3.4
  Bottom Layer w0.254: R42.1 120.904,64.643 121.609,65.348 v1(121.609,67.113)
USART3_TX: R41.2 U15.47 | length 17.6
  Top Layer w0.254: v1(101.854,64.516) 101.854,64.897 102.612,65.655 U15.47
  Bottom Layer w0.254: v1(101.854,64.516) 103.124,63.246 114.871,63.246 R41.2
USART3_TX_I: R41.1 USART3.3 | length 12.1
  Top Layer w0.254: v1(121.625,68.113) USART3.3
  Bottom Layer w0.254: R41.1 120.523,62.484 123.19,65.151 123.19,67.564 122.641,68.113 v1(121.625,68.113)
USART4_RX: R40.2 U15.24 | length 36.4
  Top Layer w0.254: U15.24 91.665,69.244 v1(92.075,68.834) ; v1(108.458,76.2) 109.347,75.311 112.268,75.311 113.665,73.914 113.665,70.866 v1(115.697,68.834)
  Bottom Layer w0.254: v1(92.075,68.834) 99.06,68.834 102.235,72.009 102.235,76.327 102.87,76.962 107.823,76.962 108.458,76.327 v1(108.458,76.2)
USART4_RX_I: R40.1 USART4.4 | length 11.2
  Top Layer w0.254: v1(121.666,76.257) USART4.4
  Bottom Layer w0.254: R40.1 119.761,68.961 120.269,69.469 120.269,74.86 v1(121.666,76.257)
USART4_TX: pad.0@92.054,69.744 pad.0@108.204,77.597 R39.2 U15.23 | length 39.9
  Top Layer w0.254: U15.23 v1(92.054,69.744) ; v1(108.204,77.597) 108.712,77.597 110.236,76.073 112.979,76.073 114.173,74.879 114.173,71.628 116.586,69.215 116.586,67.691 v1(115.697,66.802)
  Bottom Layer w0.254: v1(92.054,69.744) 98.827,69.744 101.727,72.644 101.727,76.835 102.489,77.597 v1(108.204,77.597)
USART4_TX_I: R39.1 USART4.3 | length 17
  Top Layer w0.254: v1(121.539,77.597) 121.412,77.597 121.752,77.257 USART4.3
  Bottom Layer w0.254: R39.1 119.761,66.802 120.777,67.818 120.777,72.136 123.19,74.549 123.19,76.835 122.428,77.597 v1(121.539,77.597)
USART5_RX: R44.2 U15.83 | length 34.5
  Top Layer w0.254: v1(99.695,83.947) 100.076,83.947 100.612,83.411 U15.83
  Bottom Layer w0.254: v1(99.695,83.947) 99.695,84.455 100.838,85.598 100.838,86.868 101.854,87.884 108.204,87.884 108.712,87.376 108.712,83.284 109.065,82.931 113.621,82.931 114.3,82.252 114.3,73.533 114.681,73.152 R44.2
USART5_RX_I: R44.1 USART5.4 | length 15.1
  Top Layer w0.254: v1(121.355,84.893) USART5.4
  Bottom Layer w0.254: R44.1 118.745,73.152 119.253,73.66 119.253,80.137 121.355,82.239 v1(121.355,84.893)
USART5_TX: R43.2 U15.80 | length 33
  Top Layer w0.254: v1(101.981,83.947) 102.112,83.816 U15.80
  Bottom Layer w0.254: v1(101.981,83.947) 102.108,83.947 103.378,85.217 103.378,86.995 103.759,87.376 107.823,87.376 108.331,86.868 108.331,82.931 108.839,82.423 113.411,82.423 113.792,82.042 113.792,71.628 114.427,70.993 R43.2
USART5_TX_I: R43.1 USART5.3 | length 20.3
  Top Layer w0.254: v1(121.371,85.893) USART5.3
  Bottom Layer w0.254: R43.1 118.872,70.993 119.761,71.882 119.761,79.756 122.936,82.931 122.936,85.471 122.514,85.893 v1(121.371,85.893)
USART_IMU_RX: 
USART_IMU_TX: 
VCC_2S~6S: D2.1 R4.1 VCC_IN.1 VCC_IN.2 VCC_IN.3 | length 9.4
  Top Layer w0.508: D2.1 D2.1@119.335,41.411
  Top Layer w0.762: D2.1 R4.1@119.09,44.296 ; D2.1@119.335,41.411 119.392,41.354 VCC_IN.2 ; VCC_IN.3 VCC_IN.2 ; VCC_IN.1 VCC_IN.2
VCC_3.3V: C5.2 R7.1 R20.2 S11.1 S11.2 S11.3 S11.4 SWD.4 T4.1 U11.5 U15.6 U15.11 U15.19 U15.21 U15.22 U15.28 U15.50 U15.75 U15.100 W1.3 W1.7 W1.8 | length 186.1
  Top Layer w0.254: U11.5 84.724,54.625 85.725,55.626 92.075,55.626 ; v1(87.122,68.58) 87.63,68.58 89.294,70.244 U15.22 ; v1(87.122,69.342) 87.757,69.342 89.159,70.744 U15.21 ; v1@87.133,71.744 U15.19 ; v1@87.134,78.244 U15.6 ; v1@87.174,75.744 U15.11 ; v1(89.281,86.741) R7.1 ; v1(90.805,83.947) 91.821,83.947 92.112,83.656 U15.100 ; T4.1@91.475,53.276 92.075,53.276 92.075,55.626 ; v1(93.091,65.278) 92.075,64.262 92.075,55.626 ; v1@93.112,65.299 U15.28 ; R20.2 101.283,53.276 103.886,50.673 107.823,50.673 108.585,51.435 108.585,53.975 108.077,54.483 W1.7 W1.8 C5.2@109.339,55.753 ; v1@104.112,65.306 U15.50 ; U15.75 v1(108.839,80.744) 109.827,80.744 110.998,81.915 110.998,88.519 111.633,89.154 119.507,89.154 122.423,92.07 SWD.4 120.085,93.656 119.507,94.234 119.507,98.806 S11.4 S11.3 S11.2 S11.1
  Top Layer w0.508: T4.1 R20.2@96.855,53.231 ; R20.2 R20.2@96.855,53.231 ; W1.3 96.873,53.213 R20.2@96.855,53.231
  Bottom Layer w0.254: v1(89.281,86.741) 89.281,84.455 89.789,83.947 v1(90.805,83.947) 90.805,83.502 ; v1@104.116,65.278 v1(93.091,65.278) 88.392,65.278 87.122,66.548 v1(87.122,68.58) v1(87.122,69.342) v1(87.122,71.882) v1(87.122,75.692) v1(87.122,78.232) 87.122,82.804 87.757,83.439 93.98,83.439 94.996,84.455 98.298,84.455 99.441,83.312 106.426,83.312 108.839,80.899 v1(108.839,80.744)
  other v1: 104.128,65.29
VCC_5.0V: C3.2 C4.2 D1.2 H4.8 PPM.2 PWN_IN.2 R63.1 RGB.1 SBUS.2 U11.1 U11.3 USART1.1 USART2.1 USART3.1 USART4.1 USART5.1 USB.1 V.1 V.2 V.3 V.4 | length 216.1
  Top Layer w0.254: 69.723,84.201 69.735,84.189 USB.1 72.632,84.189 73.279,84.836 ; 120.786,60.334 120.955,60.334
  Top Layer w0.508: 66.675,67.294 PWN_IN.2 ; 68.039,59.723 PPM.2 74.23,59.723 ; C3.2@79.096,53.746 U11.1 83.033,53.746 83.439,53.34 83.439,52.197 83.109,51.867 U11.3 v1(82.133,50.836) ; 120.534,79.257 USART4.1 ; 120.913,70.113 USART3.1 ; 120.955,60.334 USART2.1 ; 121.92,50.809 USART1.1
  Top Layer w0.762: 68.023,59.739 66.675,61.087 66.675,67.294 66.675,82.931 67.945,84.201 69.723,84.201 ; SBUS.2@70.563,50.767 71.722,50.767 72.136,51.181 72.136,53.34 72.771,53.975 C4.2 ; R63.1 72.517,42.291 73.37,43.144 D1.2 v1@75.565,46.299 ; 73.279,84.836 v1(73.279,85.979) ; 74.246,59.739 74.93,59.055 C4.2 ; C3.2 C4.2 ; v1(78.867,87.63) RGB.1 v1(86.36,87.63) ; H4.8@114.884,86.055 120.15,86.055 120.415,86.32 ; 121.92,50.809 120.904,51.825 v1(120.706,51.943) 120.955,52.192 120.955,60.334 120.955,66.438 120.523,66.87 120.523,68.36 120.904,68.741 120.904,75.69 120.415,76.178 120.415,86.32 ; USART5.1@122.677,87.909 121.995,87.909 120.701,86.614 120.701,86.606 120.415,86.32
  Bottom Layer w0.254: v1(120.706,51.943) v1@120.741,51.979
  Bottom Layer w0.762: v1(73.279,85.979) 73.279,86.741 74.168,87.63 v1(78.867,87.63) ; v1(75.656,46.391) 76.764,47.498 82.296,47.498 ; v1(82.133,50.836) 82.133,47.661 82.296,47.498 ; v1(86.36,87.63) 87.503,88.773 87.503,94.807 88.423,95.727 V.1@100.779,95.727 ; v1(120.706,51.943) 120.528,51.765 113.487,51.765 109.22,47.498 82.296,47.498
VCC_IN: D2.2 T1.1 U1.7 | length 20.5
  Top Layer w0.762: v1(103.124,39.243) 104.521,37.846 114.165,37.846 T1.1 ; v1@103.124,42.377 103.974,43.227 U1.7 ; T1.1@114.59,38.417 D2.2
  Bottom Layer w0.762: v1(103.124,39.243) v1(103.124,42.291)
pads on no net: PPM.0 PWN_IN.0 SBUS.0 SWD.5 U1.2 U1.3 U1.5 U15.7 U15.8 U15.9 U15.15 U15.16 U15.17 U15.18 U15.25 U15.26 U15.33 U15.38 U15.39 U15.41 U15.43 U15.46 U15.55 U15.56 U15.57 U15.58 U15.65 U15.66 U15.67 U15.77 U15.82 U15.84 U15.85 U15.89 U15.90 U15.91 U15.92 U15.93 U15.96 USART1.5 USART2.5 USART3.5 USART4.5 USART5.5 USB.4 VCC_IN.PAD
copper on no net: | length 2.3
  Top Layer w0.254: 13.462,123.444 13.462,125.73
  other v2: 91.44,38.354 92.322,38.354 93.205,38.354 95.999,38.354 91.44,39.243 92.322,39.243 93.205,39.243 95.999,39.243 91.44,40.132 92.322,40.132 93.205,40.132 95.999,40.132 92.71,41.148 93.592,41.148 92.71,42.037 93.592,42.037 92.71,42.926 93.592,42.926 80.01,89.789 80.892,89.789 81.775,89.789 82.677,89.789 83.559,89.789 84.442,89.789 80.01,90.678 80.892,91.567 81.775,91.567 82.677,91.567 83.559,91.567 84.442,91.567

## Polygon pours and split planes (outlines as drawn)
VCC_2S~6S on Top Layer "Top Layer-No Net" (solid, remove dead copper, pour order 20): 124.587,42.799 124.587,40.005 117.729,40.005 117.729,45.593 120.396,45.593 120.396,42.799 124.587,42.799
GND on Top Layer "Top Layer-No Net" (solid, remove dead copper, pour order 7): 62.738,105.664 131.826,105.664 131.953,105.537 132.08,105.41 132.08,33.528 62.865,33.528 62.738,33.401 62.738,105.664
GND on Bottom Layer "Top Layer-No Net" (solid, remove dead copper, pour order 11): 63.625,105.029 131.828,105.029 132.08,104.777 132.08,33.528 63.373,33.528 63.373,104.903
GND on GND "Top Layer-No Net" (solid, remove dead copper, pour order 13): 63.372,104.902 131.954,104.902 132.08,104.776 132.08,33.401 63.246,33.401 63.372,33.527 63.372,104.902
VCC_3.3V on VCC "Top Layer-No Net" (solid, remove dead copper, pour order 15): 63.246,104.775 132.08,104.775 132.08,33.274 63.372,33.274 63.246,33.399 63.246,104.775

## Keep-outs
Keep-Out Layer:
  lines w0.254: 62.738,35.56 62.738,103.251 cw(c65.532,102.87) 65.913,105.664 129.667,105.664 cw(c129.286,102.87) 132.08,102.489 ; 62.738,36.449 ccw(c65.532,36.068) 65.151,33.274 128.905,33.274 ccw(c129.286,36.068) 132.08,35.687 132.08,103.378

## Silkscreen, mask and mechanical layers (free items; w line width, h text height)
Top Overlay:
  text "19四轴飞控板" at 64.516,101.219 h3.81
Bottom Overlay:
  text "VCGD" at 130.175,92.329 h1.52 r270
  text "VGTR" at 131.699,89.027 h1.52 r90
  text "VGTR" at 131.572,80.518 h1.52 r90
  text "VGTR" at 131.826,71.247 h1.52 r90
  text "GVPWM1-8" at 64.516,66.802 h1.52 r90
  text "GVP" at 65.024,61.849 h1.52 r90
  text "VGTR" at 131.699,61.341 h1.52 r90
  text "VGTR" at 131.699,51.943 h1.52 r90
  text "GVS" at 64.897,49.022 h1.52 r90
  text "V-G" at 131.699,41.91 h1.52 r90